# Altium PCB CANTerm.PcbDoc
Units mil, origin at the board's own origin, x right, y up, seen from the top; angles counter-clockwise.
Board outline 1210 x 855 mil, 2 copper layers (Top Layer, Bottom Layer), stack 62.8 mil thick; 2 components, 2 nets, 8 pads, 0 vias.
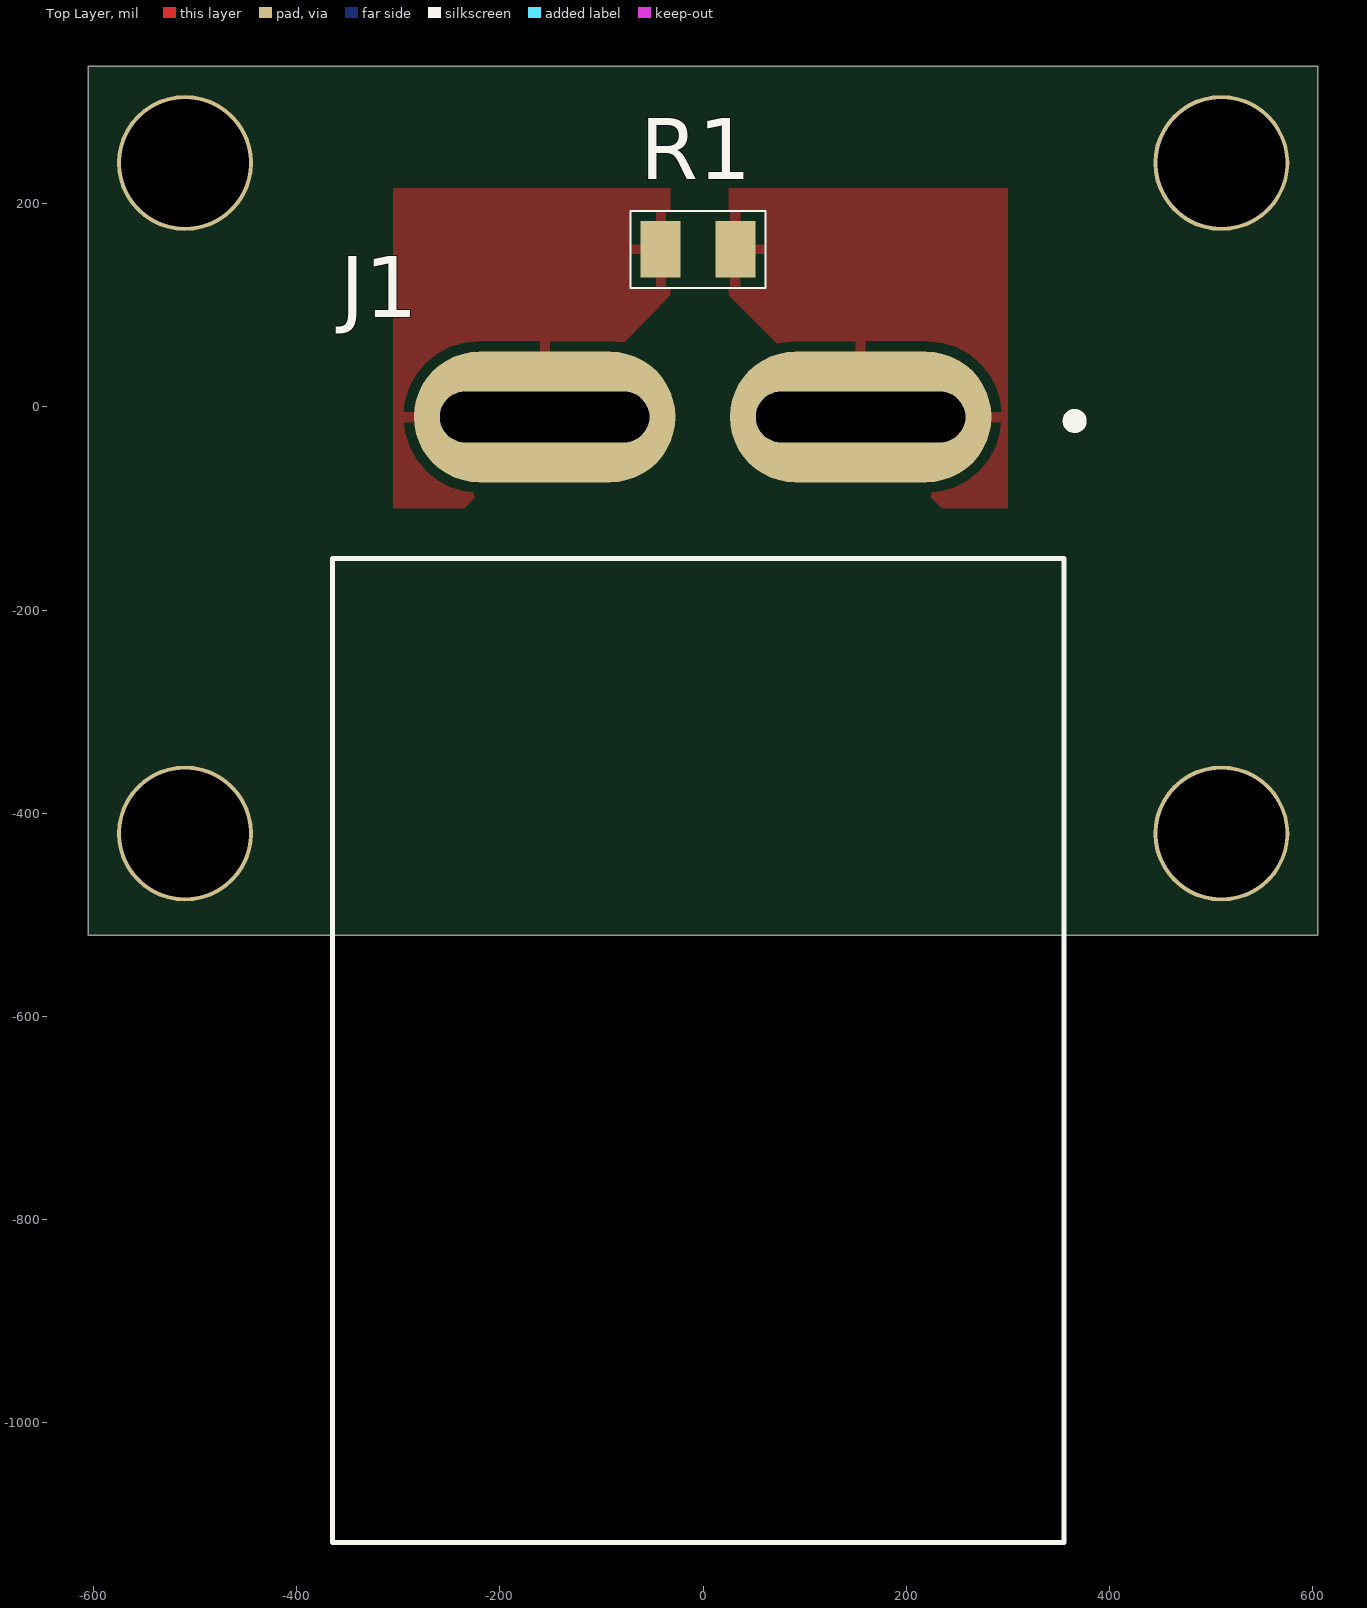
[diagram p0: Top Layer view]
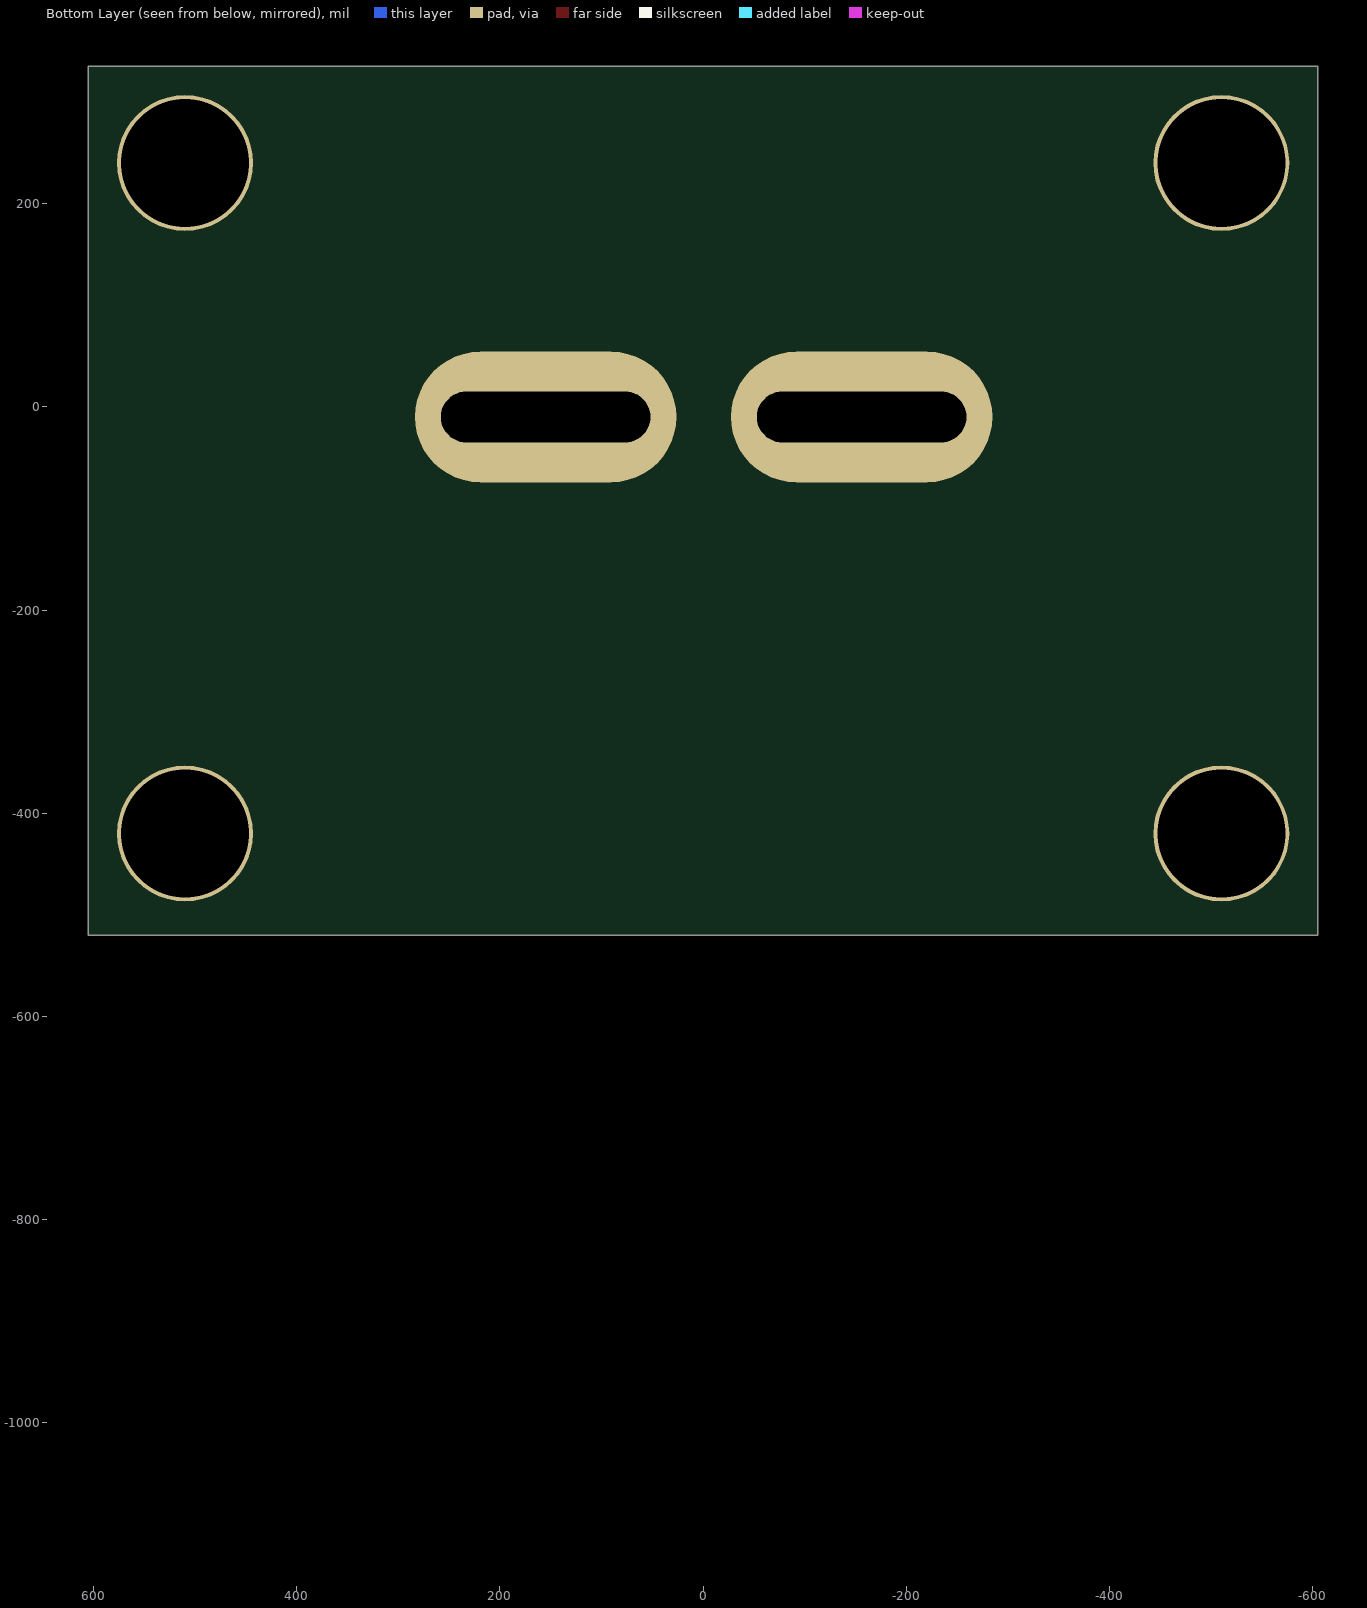
[diagram p1: Bottom Layer view, seen from below]

## Layer stack, top to bottom
Top Solder: solder mask 1, Solder Resist, Dk 3.5
Top Layer: signal copper 1.4
Dielectric 1: dielectric 60, FR-4, Dk 4.8
Bottom Layer: signal copper 1.4
Bottom Solder: solder mask 1, Solder Resist, Dk 3.5

## Board outline
-605,-520 605,-520 605,335 -605,335

## Design rules (kind name [scope] priority, off if disabled: settings)
Clearance [All] p1: gap=10 ignorepadtopadclearanceinfootprint=FALSE except(0: Arc-Hole Track-Hole SMDPad-Hole THPad-Hole Via-Hole Fill-Hole Poly-Hole Region-Hole Text-Hole)
PolygonConnect [All] p1: connectstyle=Relief reliefconductorwidth=10 reliefentries=4 polygonreliefangle="90 Angle" airgapwidth=10
RoomDefinition CANTerm [InComponentClass('CANTerm')] p1: confinementstyle=ConfineIn formatcopy=TRUE lockcomponents=FALSE outline -600,-1145 605,-1145 605,330 -600,330
RoutingVias [All] p1: holewidth=28 width=50 viastyle="Through Hole" minholewidth=28 minwidth=50 maxholewidth=28 maxwidth=50
SMDNeckDown [All] p1: percent=50.000
SolderMaskExpansion [All] p1: expansion=4 istentingtop=FALSE
Width [All] p1: maxlimit=50 minlimit=10 preferedwidth=30 minimp=50.000000 maximp=50.000000 favimp=50.000000
30 further rules are at their usual default settings.

## Components (designator, comment, footprint, x,y, rotation, side; value= is the part's Value field where it differs from the comment)
J1 "ASMPR45-1X2-RK" APP_ASMPR45-1X2-RK 155,-10 r180 top
R1 "120" R0805 -5,155 r0 top

## Footprints (in the part's own frame and the unit in brackets; to place one, negate y for a bottom-side part, rotate by r counter-clockwise, add the part's x,y. Pads: shape width x height; smd on the part's side, far side on the other; paste and mask are expansions set on the pad)
APP_ASMPR45-1X2-RK [mm]
  oval 6.54x3.27 hole 1.27 slot 5.23 at 0 deg: 1(0,0) 2(7.9,0)
  silkscreen extent -5.5,-0.05 13.21,28.14, body extent -4.11,-0.46 12.19,28.14, height 8.41
R0805 [mm] "CRGCQ0805Fxxxx"
  rect 1x1.42 smd: 1(-0.935,0) 2(0.935,0)
  silkscreen extent -1.69,-0.96 1.69,0.96, body extent -1,-0.63 1,0.63, height 0.66

## Part data
J1: "C-powerpoles 10 / 45, PP15/45 1X2 45 Amp Horizontal Pcb Assembly Red, Blk.", Manufacturer="Anderson Power", Supplier Part Number 1=2243-ASMPR45-1X2-RK-ND, Category=Connectors, Manufacturer Part Number=ASMPR45-1X2-RK, Pricing 1="1=4.44000, 10=4.02800, 25=3.81520, 50=3.72640, 100=3.54900, 250=3.10536, 500=3.01664, 1000=2.57302, 2500=2.39558 (USD)", RoHS=No, Stock 1=801, Supplier 1=Digi-Key
R1: library part CRGCQ0805F120R, "Fixed Resistor CRGCQ 0805 120R 1%", Package="2012 TE Connectivity", Availability=Unavailable, MF="TE Connectivity", MP=CRGCQ0805F120R, Price=None, SnapEDA_Link=https://www.snapeda.com/parts/CRGCQ0805F120R/TE%20Connectivity/view-part/3187861/?ref=snap, TE_purchase_URL=https://www.te.com/usa-en/product-1-2176341-4.html?te_bu=Cor&te_type=disp&te_campaign=seda_glo_cor-seda-global-disp-prtnr-fy19-seda-model-bom-cta_sma-317_1&elqCampaignId=32493

## Free pads (board coordinates)
  round 133.86 hole 125.98: 13(-510,-420) 13(-510,240) 13(510,-420) 13(510,240)

## Nets (pads, with @x,y where several pads share a name; then routed paths per layer and width w, separated by ;. In a path a pad name is that pad's centre, name@x,y a point inside that pad or via, vN(x,y) a via of type N, cw(c..) or ccw(c..) an arc to the next point about the centre after c; other vN are vias at no path point)
CAN_H: J1.1 R1.2
CAN_L: J1.2 R1.1

## Polygon pours and split planes (outlines as drawn)
CAN_H on Top Layer "CAN_H_L01_P001" (solid, pour order 1): 25,215 25,110 235,-100 300,-100 300,215
CAN_L on Top Layer "CAN_L_L01_P000" (solid, pour order 0): -32.5,215 -32.5,110 -235,-100 -305,-100 -305,215

## Silkscreen, mask and mechanical layers (free items; w line width, h text height)
Mechanical 15:
  the board outline again, w1